# Altium PCB PoEbytastic_v0.1.PcbDoc
Units mm, origin at the board's own origin, x right, y up, seen from the top; angles counter-clockwise.
Board outline 57.53 x 55.13 mm, 2 copper layers (Top Layer, Bottom Layer); 10 components, 36 nets, 125 pads, 59 vias.
Unrouted connection lines stored in the file: 5.
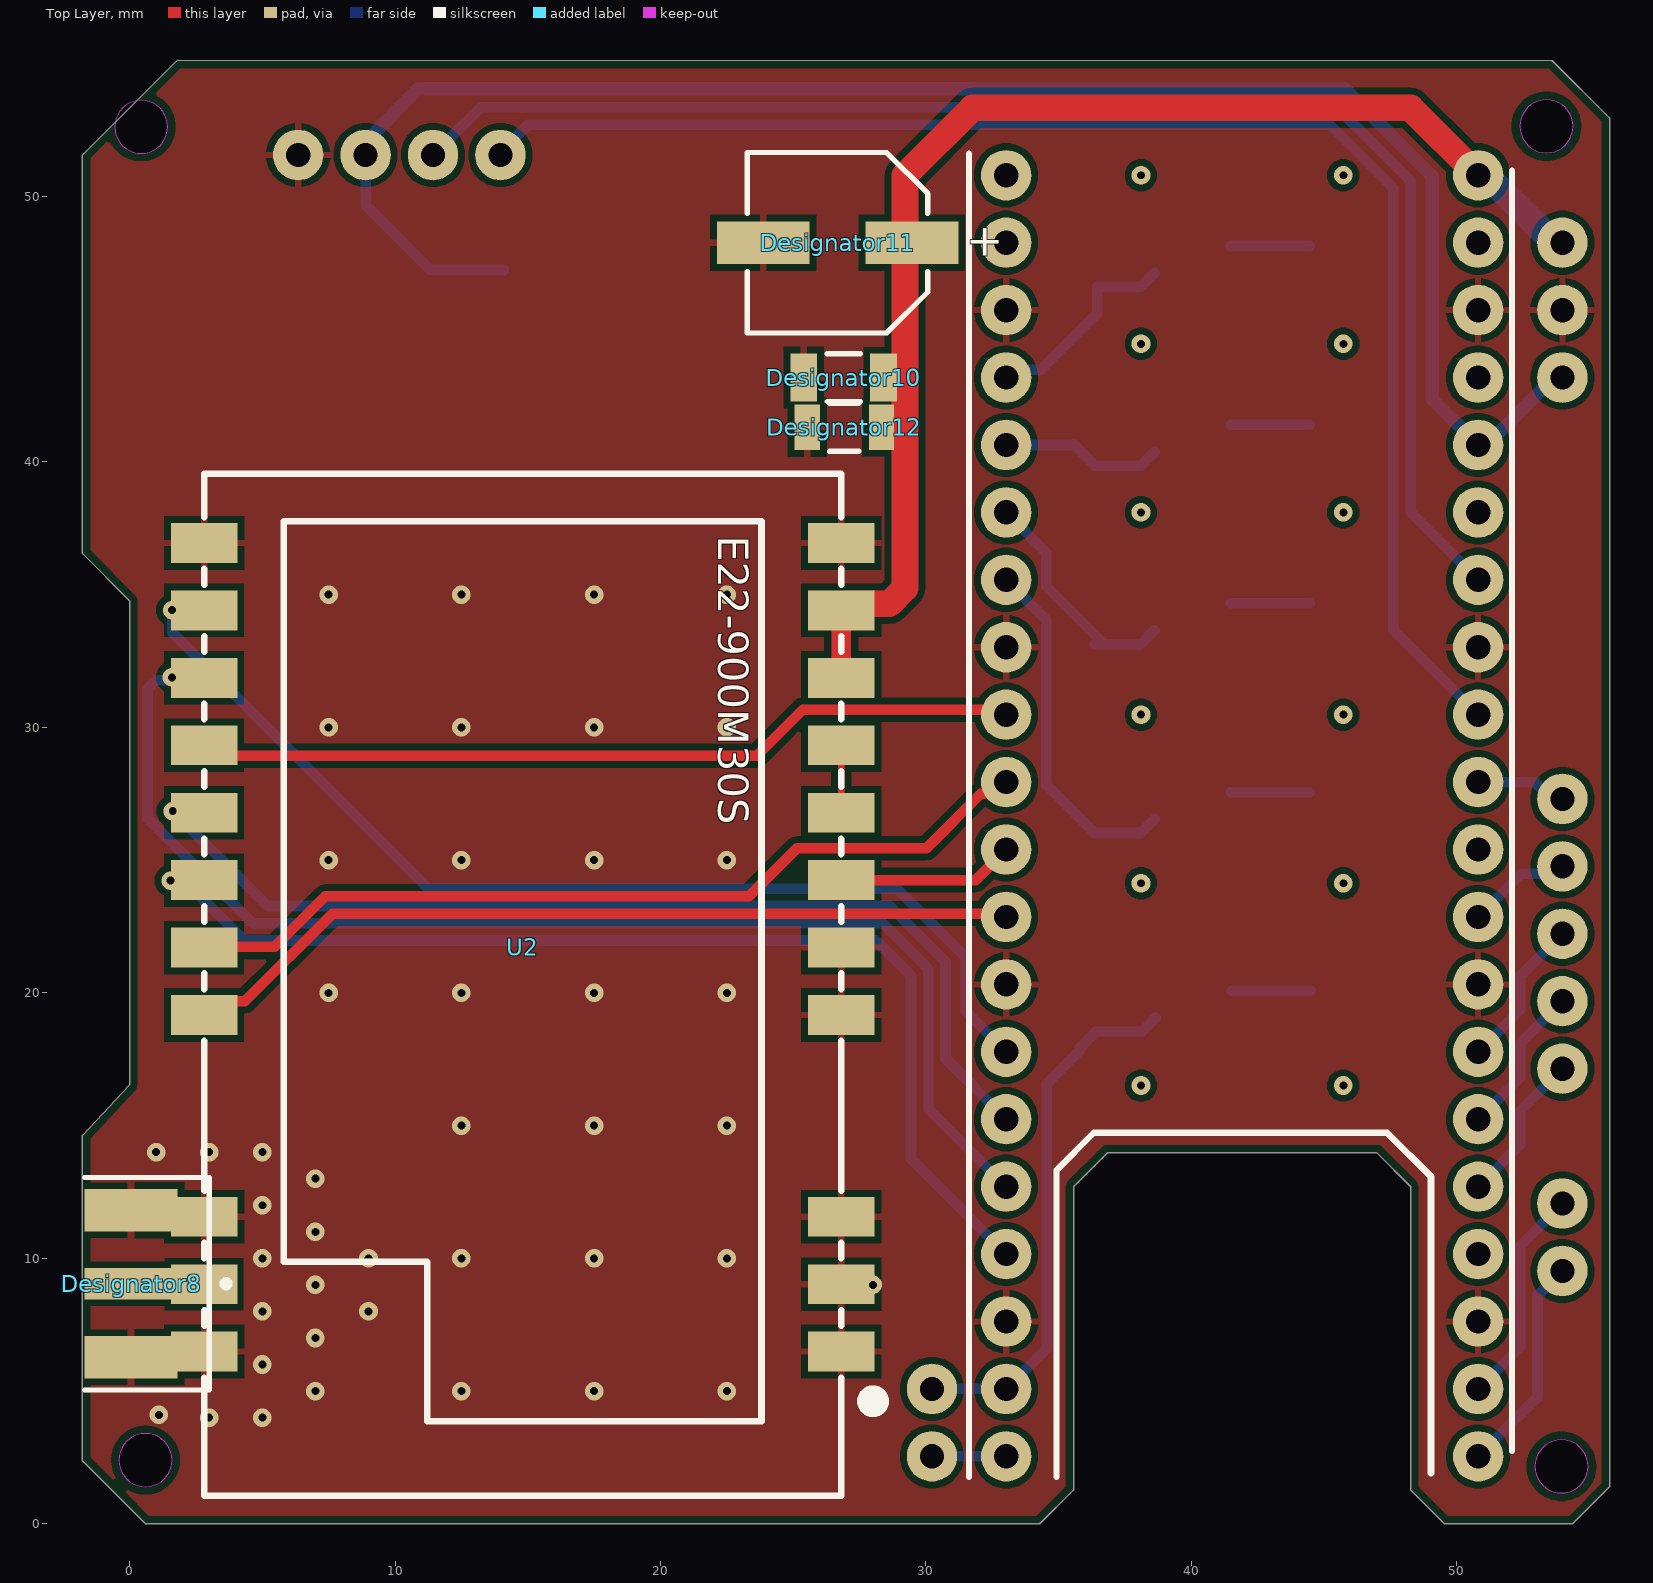
[diagram p0: Top Layer view]
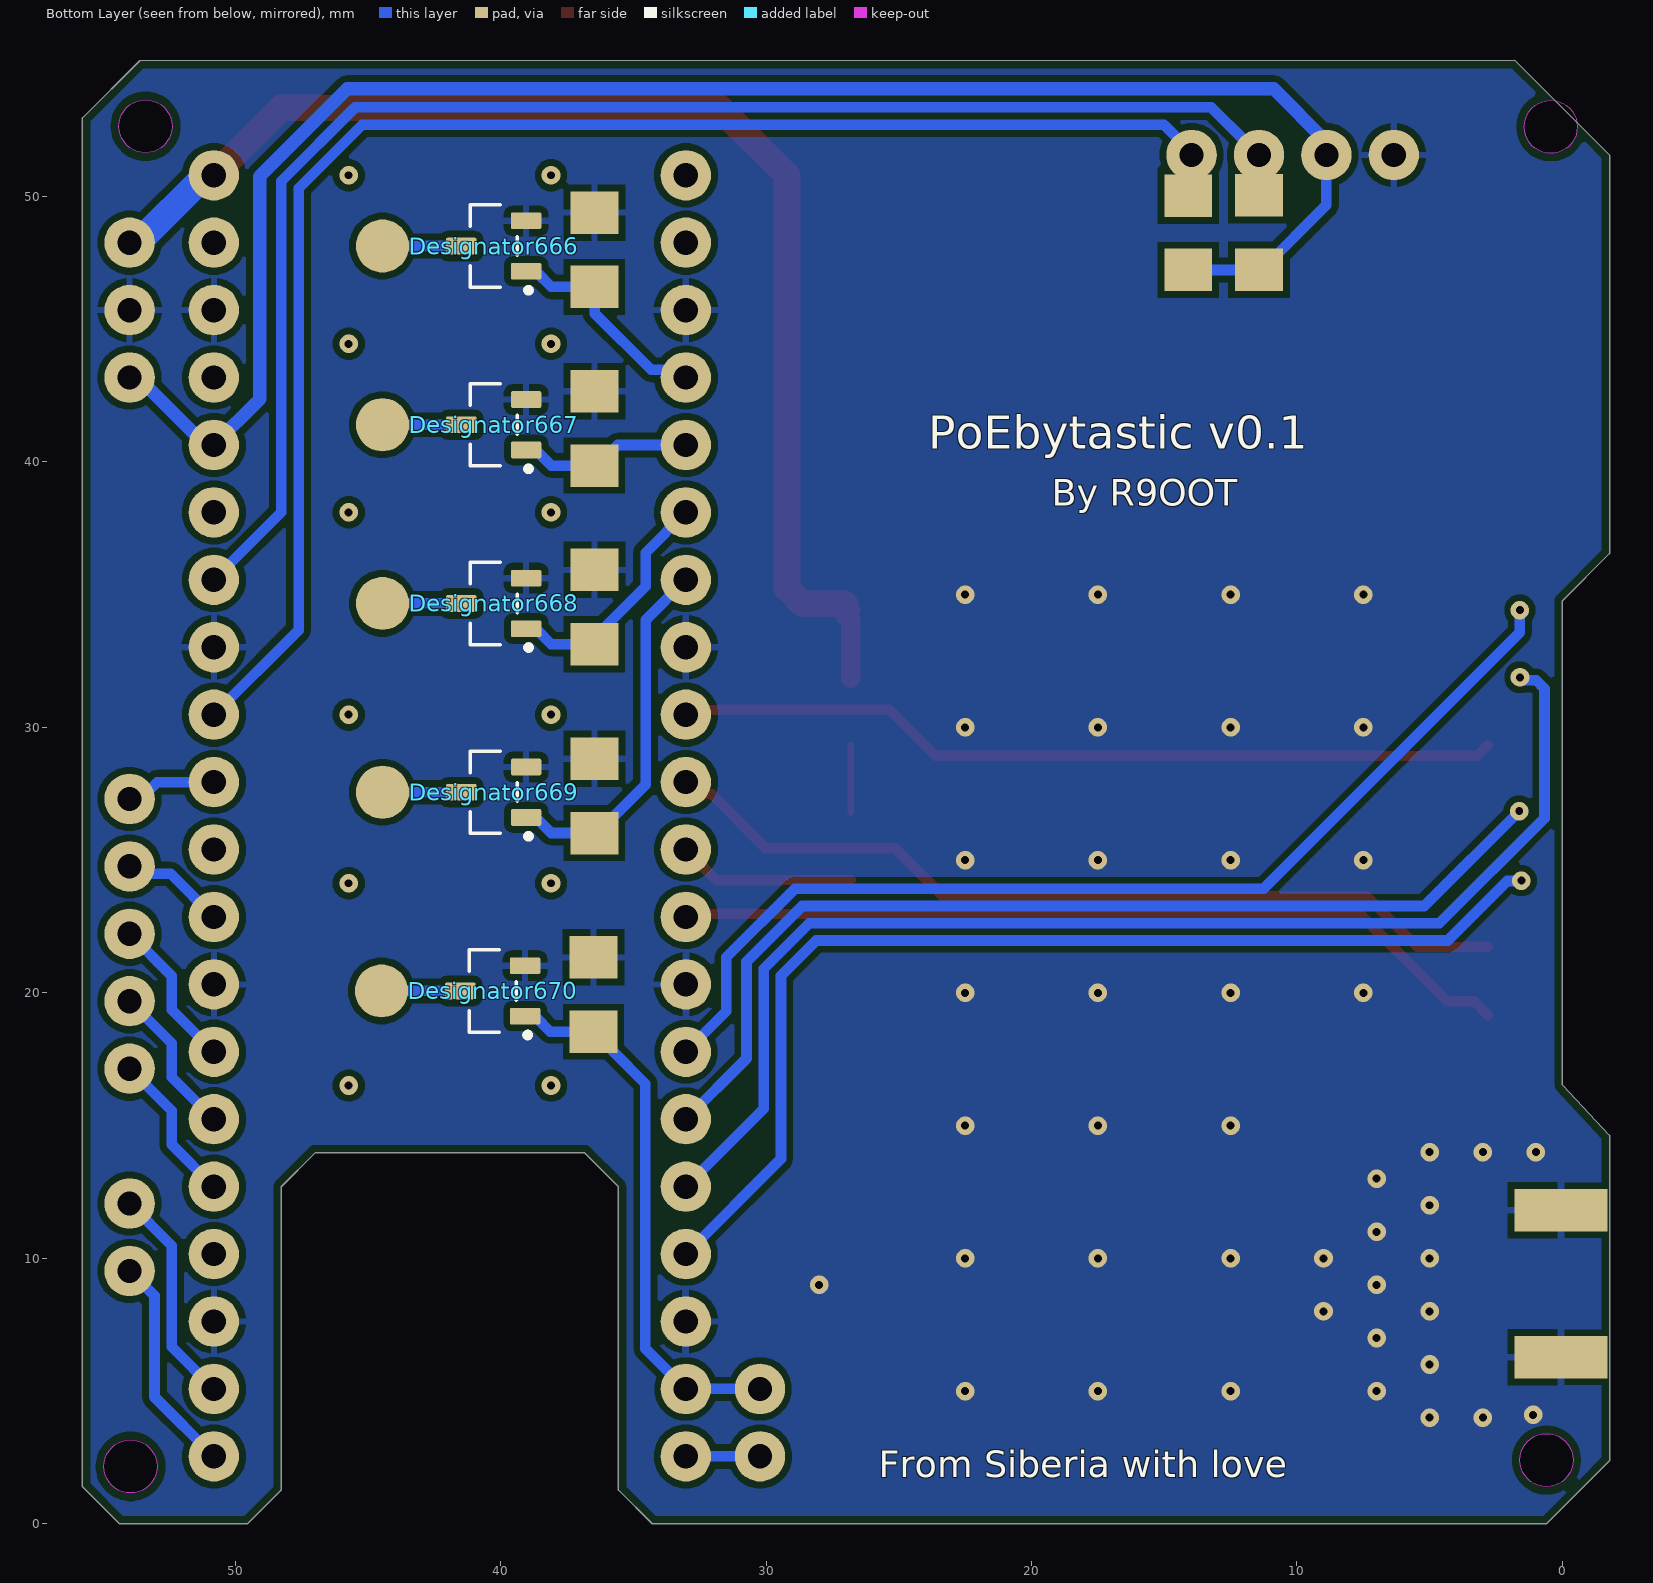
[diagram p1: Bottom Layer view, seen from below]
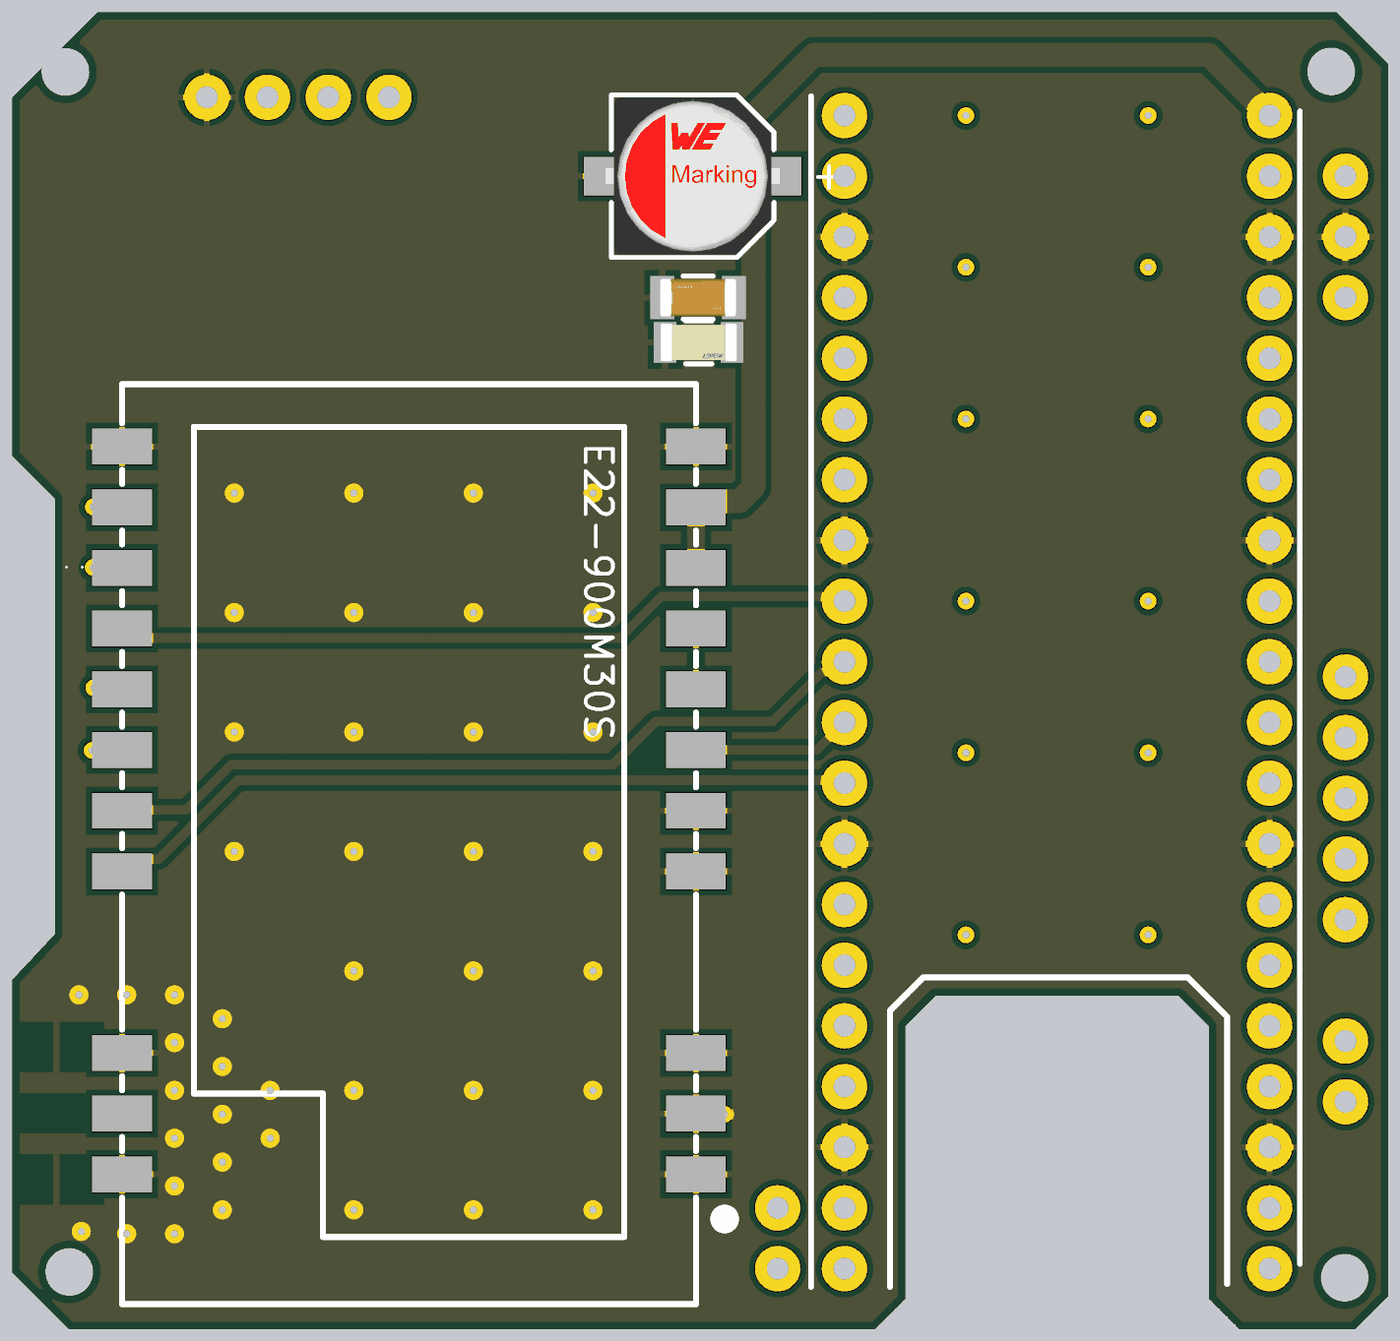
[diagram p2: 3D render of the assembled board from above, using the file's embedded part models]
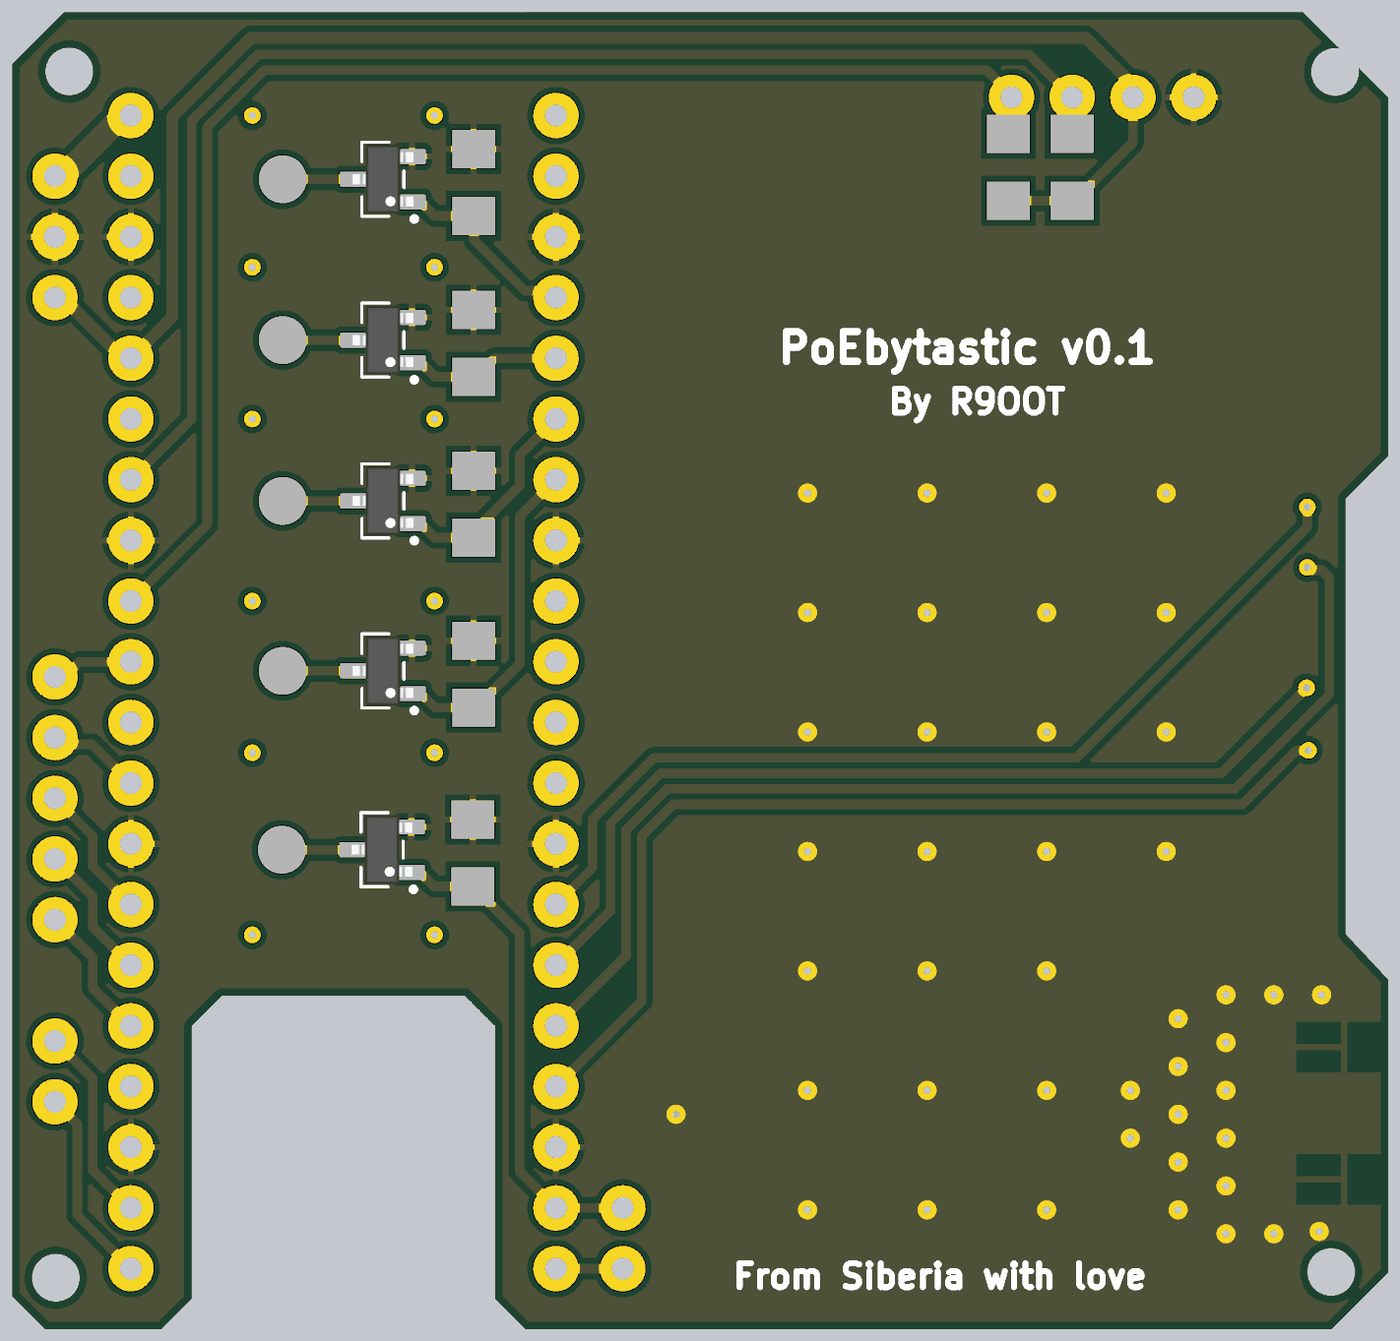
[diagram p3: 3D render of the assembled board from below, using the file's embedded part models]

## Layer stack, top to bottom
Top Solder: solder mask 0.0102, Solder Resist, Dk 3.5
Top Layer: signal copper 0.0356
Dielectric 1: dielectric 0.32, FR-4, Dk 4.8
Bottom Layer: signal copper 0.0356
Bottom Solder: solder mask 0.0102, Solder Resist, Dk 3.5

## Board outline
35.56,1.27 35.56,12.7 36.83,13.97 46.99,13.97 48.26,12.7 48.26,1.27 49.53,0 54.356,0 55.753,1.397 55.753,52.959 53.595,55.117 1.787,55.127 -1.778,51.562 -1.778,36.549 0,34.771 0,16.535 -1.778,14.63 -1.778,2.378 0.6,0 34.29,0
cut-out: 52.375,52.646 ccw(c53.375,52.646) 53.375,51.646 ccw(c53.375,52.646) 54.375,52.646 ccw(c53.375,52.646) 53.375,53.646 ccw(c53.375,52.646)
cut-out: -0.561,52.626 ccw(c0.439,52.626) 0.439,51.626 ccw(c0.439,52.626) 1.439,52.626 ccw(c0.439,52.626) 0.439,53.626 ccw(c0.439,52.626)
cut-out: 52.94,2.161 ccw(c53.94,2.161) 53.94,1.161 ccw(c53.94,2.161) 54.94,2.161 ccw(c53.94,2.161) 53.94,3.161 ccw(c53.94,2.161)
cut-out: -0.4,2.4 ccw(c0.6,2.4) 0.6,1.4 ccw(c0.6,2.4) 1.6,2.4 ccw(c0.6,2.4) 0.6,3.4 ccw(c0.6,2.4)

## Design rules (kind name [scope] priority, off if disabled: settings)
BoardOutlineClearance [All] p1: gap=0.3 ignorepadtopadclearanceinfootprint=FALSE
Clearance [All] p1: gap=0.25 ignorepadtopadclearanceinfootprint=FALSE
PolygonConnect [All] p1: thpad.connectstyle=Relief thpad.reliefconductorwidth=0.254 thpad.reliefentries=4 thpad.polygonreliefangle="90 Angle" thpad.airgapwidth=0.254 smdpad.connectstyle=Relief smdpad.reliefconductorwidth=0.254 smdpad.reliefentries=4 smdpad.polygonreliefangle="90 Angle" smdpad.airgapwidth=0.254 via.connectstyle=Direct via.reliefconductorwidth=0.254 via.reliefentries=4 via.polygonreliefangle="90 Angle" via.airgapwidth=0.254
RoutingVias [All] p1: holewidth=0.711 width=1.27 viastyle="Through Hole" minholewidth=0.711 minwidth=1.27 maxholewidth=0.711 maxwidth=1.27
SilkToSilkClearance [All] p1: silktosilkclearance=0.15
SilkToSolderMaskClearance [IsPad] p1: minsilkscreentomaskgap=0.15 clearancetoexposedcopper=TRUE
SolderMaskExpansion [All] p1: expansion=0.05 istentingtop=FALSE
Width [All] p1: maxlimit=1 minlimit=0.25 preferedwidth=0.4 minimp=50.000000 maximp=50.000000 favimp=50.000000
28 further rules are at their usual default settings.

## Components (designator, comment, footprint, x,y, rotation, side; value= is the part's Value field where it differs from the comment)
Designator8 "Comment" FP-CON-SMA-EDGE-S-MFG -7.2,9.042 r90 top
Designator10 "Comment" FP-CC1206-1_25-MFG 26.9,43.18 r180 top
Designator11 "Comment" WCAP-AS5H_D6.3H7.7 26.67,48.26 r0 top
Designator12 "Comment" FP-C1206C-EB-MFG 26.924,41.306 r180 top
Designator666 "Comment" SOT23-3 40.259,48.133 r90 bottom
Designator667 "Comment" SOT23-3 40.259,41.402 r90 bottom
Designator668 "Comment" SOT23-3 40.259,34.671 r90 bottom
Designator669 "Comment" SOT23-3 40.259,27.559 r90 bottom
Designator670 "Comment" SOT23-3 40.296,20.074 r90 bottom
U2 "E22-900M30S" WIRELM-SMD_E22-900M30S 14.808,21.717 r0 top

## Footprints (in the part's own frame and the unit in brackets; to place one, negate y for a bottom-side part, rotate by r counter-clockwise, add the part's x,y. Pads: shape width x height; smd on the part's side, far side on the other; paste and mask are expansions set on the pad)
FP-C1206C-EB-MFG [mm]
  rect 0.95x1.7 smd paste+0 mask+0: 1(-1.4,0) 2(1.4,0)
  silkscreen extent -0.55,-0.9 0.55,0.9, body extent -2,-1 2,1, height 0.25
FP-CC1206-1_25-MFG [mm]
  rect 1x1.8 smd paste+0 mask+0: 1(-1.5,0) 2(1.5,0)
  silkscreen extent -0.63,-0.9 0.63,0.9, body extent -2.2,-1.25 2.2,1.25, height 0.25
FP-CON-SMA-EDGE-S-MFG [mm]
  rect 1.2x3.5 smd paste+0 mask+0: 1(0,-7.26)
  rect 1.6x3.5 smd paste+0 mask+0: 2(-2.77,-7.26) 3(2.77,-7.26)
  rect 1.6x3.5 smd far side paste+0 mask+0: 4(-2.77,-7.26) 5(2.77,-7.26)
  silkscreen extent -4,-10.96 4,-5.5, body extent -3.67,-9.86 3.67,4.86, height 0.25
SOT23-3 [mm]
  rrect20% 0.63x1.15 smd: 1(-0.95,-1.22) 2(0.95,-1.22) 3(0,1.22)
  silkscreen extent -1.76,-1.41 1.55,0.88, body extent -1.44,-1.27 1.44,1.28, height 1.45
WCAP-AS5H_D6.3H7.7 [mm] "Aluminum Electrolytic Capacitors, 6.3x7.7mm"
  rect 3.5x1.6 smd: 1(2.8,0) 2(-2.8,0)
  silkscreen extent -3.4,-3.4 3.4,3.4, body extent -3.65,-3.3 3.65,3.3, height 7.7
WIRELM-SMD_E22-900M30S [mm]
  rect 2.5x1.5 smd paste+0 mask+0.051: 1(12,-15.23) 2(12,-12.69) 3(12,-10.15) 4(12,-2.55) 5(12,-0.01) 6(12,2.53) 7(12,5.07) 8(12,7.61) 9(12,10.15) 10(12,12.69) 11(12,15.23) 12(-12,15.23) 13(-12,12.69) 14(-12,10.15) 15(-12,7.61) 16(-12,5.07) 17(-12,2.53) 18(-12,-0.01) 19(-12,-2.55) 20(-12,-10.15) 21(-12,-12.69) 22(-12,-15.23)
  silkscreen extent -12,-20.66 13.5,17.84

## Part data
Designator666 Designator667 Designator668 Designator669 Designator670: library part 1-009-727

## Free pads (board coordinates)
  round 1.9 hole 0.915: 0(50.8,10.16) 1(6.35,51.562) 1(8.89,51.562) 1(11.43,51.562) 1(13.97,51.562) 1(50.8,12.7) 1(53.975,17.145) 2(50.8,15.24) 2(53.975,19.685) 3(50.8,17.78) 3(53.975,22.225) 3V3(50.8,40.64) 3V3(53.975,43.18) 3V3_EN(50.8,43.18) 15(50.8,22.86) 15(53.975,24.765) 16(50.8,30.48) 17(50.8,35.56) 18(50.8,27.94) 18(53.975,27.305) "19 USB"(33.02,48.26) "20 USB"(33.02,50.8) "21 RGB"(50.8,38.1) 33(30.226,2.54) 33(33.02,2.54) 34(30.226,5.08) 34(33.02,5.08) 35(33.02,10.16) 36(33.02,12.7) 37(33.02,15.24) 38(33.02,17.78) 39(33.02,22.86) 40(33.02,25.4) 41(33.02,27.94) 42(33.02,30.48) "43 UART"(50.8,2.54) "43 UART"(53.975,9.525) "44 UART"(50.8,5.08) "44 UART"(53.975,12.065) 45(33.02,35.56) 46(33.02,38.1) 47(33.02,40.64) 48(33.02,43.18) GND(33.02,7.62) GND(33.02,20.32) GND(33.02,33.02) GND(33.02,45.72) GND(50.8,7.62) GND(50.8,20.32) GND(50.8,33.02) GND(50.8,45.72) GND(53.975,45.72) RUN(50.8,25.4) VBUS(50.8,50.8) VBUS(53.975,48.26) VSYS(50.8,48.26)
  round 0.102 on Top Overlay: 1(0.488,31.9) 1(1.143,31.9)
  rect 1.8x1.6 smd far side paste+0: 1(11.43,47.238) 1(11.43,50.038) 1(14.097,47.232) 1(14.097,50.032) 1(36.463,26.021) 1(36.463,28.821) 1(36.463,33.133) 1(36.463,35.933) 1(36.463,39.864) 1(36.463,42.664) 1(36.463,46.595) 1(36.463,49.395) 1(36.5,18.536) 1(36.5,21.336)
  round 2 smd far side: 2(44.45,27.559) 2(44.45,34.671) 2(44.45,41.402) 2(44.45,48.133) 2(44.487,20.074)

## Via types
v1: diameter 0.7, hole 0.3, Top Layer to Bottom Layer, 59 vias

## Nets (pads, with @x,y where several pads share a name; then routed paths per layer and width w, separated by ;. In a path a pad name is that pad's centre, name@x,y a point inside that pad or via, vN(x,y) a via of type N, cw(c..) or ccw(c..) an arc to the next point about the centre after c; other vN are vias at no path point)
1: pad.1@50.8,12.7 pad.1@53.975,17.145 | length 5.8
  Bottom Layer w0.4: pad.1@50.8,12.7 52.387,14.287 52.387,15.557 pad.1@53.975,17.145
2: pad.2@50.8,15.24 pad.2@53.975,19.685 | length 5.8
  Bottom Layer w0.4: pad.2@50.8,15.24 52.387,16.827 52.387,18.097 pad.2@53.975,19.685
3: pad.3 | length 5.8
  Bottom Layer w0.4: pad.3@50.8,17.78 52.387,19.368 52.387,20.638 pad.3@53.975,22.225
15: pad.15 | length 4
  Bottom Layer w0.4: pad.15@50.8,22.86 52.425,24.485 53.695,24.485 pad.15@53.975,24.765
18: pad.18 | length 3.4
  Bottom Layer w0.4: pad.18@50.8,27.94 52.934,27.94 53.569,27.305 pad.18@53.975,27.305
106: 
$Net33: pad.33 | length 2.8
  Bottom Layer w0.4: pad.33@30.226,2.54 pad.33@33.02,2.54
$Net34: Designator670.1 pad.1@36.5,18.536 pad.34 | length 20.1
  Bottom Layer w0.4: pad.34@30.226,5.08 33.02,5.08 34.544,6.604 34.544,16.58 35.8,17.836 35.8,17.936 36.4,18.536 36.5,18.536 38.123,18.536 Designator670.1@38.645,19.058
+3.3v: pad.1@8.89,51.562 pad.1@11.43,47.238 pad.1@14.097,47.232 pad.3V3 | length 65.5
  Bottom Layer w0.4: pad.1@8.89,51.562 8.89,49.678 11.33,47.238 11.43,47.238 11.436,47.232 pad.1@14.097,47.232 ; pad.3V3@50.8,40.64 pad.3V3@51.117,40.64 ; pad.3V3@53.657,43.18 pad.3V3@53.975,43.18
  Bottom Layer w0.5: pad.1@8.89,52.07 10.875,54.055 45.771,54.055 49.072,50.754 49.072,42.368 pad.3V3@50.8,40.64 ; pad.3V3@51.117,40.64 pad.3V3@53.657,43.18
+5v: Designator10.1 Designator11.1 Designator12.1 pad.VBUS U2.9 U2.10 | length 48.9
  Top Layer w0.75: U2.9 26.808,34.008 27.008,34.208 U2.10 U2.10@27.001,34.6
  Top Layer w1: U2.10@27.001,34.6 27.058,34.657 28.624,34.657 29.21,35.243 29.21,50.8 31.75,53.34 48.26,53.34 pad.VBUS@50.8,50.8
  Bottom Layer w0.4: pad.VBUS@50.8,50.8 pad.VBUS@51.117,50.8 ; pad.VBUS@53.657,48.26 pad.VBUS@53.975,48.26
  Bottom Layer w1: pad.VBUS@51.117,50.8 pad.VBUS@53.657,48.26
+B: 
AUX_0: Designator666.1 pad.1@36.463,46.595 pad.48 | length 7.8
  Bottom Layer w0.4: pad.48 33.307,43.467 34.323,43.467 36.449,45.593 36.449,46.581 36.463,46.595 38.086,46.595 Designator666.1@38.608,47.117
AUX_1: Designator667.1 pad.1@36.463,39.864 pad.47 | length 6.1
  Bottom Layer w0.4: pad.47 35.587,40.64 36.363,39.864 36.463,39.864 38.086,39.864 Designator667.1@38.608,40.386
AUX_2: Designator668.1 pad.1@36.463,33.133 pad.46 | length 8.8
  Bottom Layer w0.4: pad.46 34.535,36.585 34.535,35.315 pad.1@36.59,33.26 ; pad.1@36.363,33.133 36.463,33.133 38.086,33.133 Designator668.1@38.608,33.655
AUX_3: Designator669.1 pad.1@36.463,26.021 pad.45 | length 13.4
  Bottom Layer w0.4: pad.45 34.535,34.045 34.535,27.849 36.363,26.021 36.463,26.021 38.086,26.021 Designator669.1@38.608,26.543
AUX_4: 
"Batt% 031": 
BUSY: pad.36 U2.14 | length 47.1
  Bottom Layer w0.4: v1@1.623,31.773 0.988,31.773 0.676,31.46 0.676,26.58 4.633,22.622 ; 4.633,22.621 28.373,22.621 30.084,20.91 30.084,15.636 pad.36
  other v1: 1.599,31.887
"Button 100": 
CS: pad.39 U2.19 | length 31.8
  Top Layer w0.4: U2.19 3.324,19.683 4.341,19.683 7.645,22.987 pad.39@33.02,22.987
DIO1: pad.38 U2.13 | length 40
  Bottom Layer w0.4: v1(1.6,34.417) 1.6,33.579 11.258,23.921 28.911,23.921 31.496,21.336 31.496,19.304 pad.38
DIO2: U2.7 U2.8 | length 2.5
  Top Layer w0.254: U2.7 U2.8
GND: Designator8.2 Designator8.3 Designator8.4 Designator8.5 Designator10.2 Designator11.2 Designator12.2 Designator666.2 Designator667.2 Designator668.2 Designator669.2 Designator670.2 pad.1@6.35,51.562 pad.1@36.5,21.336 pad.1@36.463,28.821 pad.1@36.463,35.933 pad.1@36.463,42.664 pad.1@36.463,49.395 pad.GND U2.1 U2.2 U2.3 U2.4 U2.5 U2.11 U2.12 U2.20 U2.22
  other v1: 3,4 5,4 1.1,4.1 7,5 12.5,5 17.5,5 22.5,5 5,6 7,7 5,8 9,8 7,9 28,9 5,10 9,10 12.5,10 17.5,10 22.5,10 7,11 5,12 7,13 1,14 3,14 5,14 12.5,15 17.5,15 22.5,15 7.5,20 12.5,20 17.5,20 22.5,20 7.5,25 12.5,25 17.5,25 22.5,25 7.5,30 12.5,30 17.5,30 22.5,30 7.5,35 12.5,35 17.5,35 22.5,35
"GPS_RX 020": 
"GPS_TX 022": 
MISO: pad.37 U2.16 | length 38.3
  Bottom Layer w0.4: v1(1.626,26.848) 5.202,23.271 28.642,23.271 30.734,21.179 30.734,17.526 pad.37
MOSI: pad.35 U2.17 | length 41.3
  Bottom Layer w0.4: v1(1.549,24.232) 1.567,24.214 2.075,24.214 4.318,21.971 28.103,21.971 29.434,20.64 29.434,13.746 pad.35
NRST: pad.42 U2.15 | length 31.1
  Top Layer w0.4: U2.15 3.205,28.931 23.622,28.931 25.358,30.667 pad.42@33.02,30.667
RST: 
RXEN: pad.40 U2.6 | length 6.7
  Top Layer w0.4: U2.6 31.867,24.247 pad.40
SCK: pad.41 U2.18 | length 32.8
  Top Layer w0.4: U2.18@2.808,21.732 5.471,21.732 7.376,23.637 23.332,23.637 25.142,25.447 30.019,25.447 32.07,27.498 32.172,27.498 32.614,27.94 pad.41
SCL: pad.1@11.43,50.038 pad.1@11.43,51.562 pad.17 | length 54.6
  Bottom Layer w0.4: pad.1@11.448,52.052 11.92,52.052 13.223,53.355 45.481,53.355 48.26,50.576 48.26,38.1 pad.17
SDA: pad.1@13.97,51.562 pad.1@14.097,50.032 pad.16 | length 56
  Bottom Layer w0.4: pad.1@13.97,52.07 14.376,52.07 15.011,52.705 45.212,52.705 47.609,50.308 47.609,33.671 pad.16
"uart 43": "pad.43 UART" | length 8.3
  Bottom Layer w0.4: 50.8,2.54 53.037,4.777 53.037,8.587 53.975,9.525
"uart 44": "pad.44 UART" | length 8.3
  Bottom Layer w0.4: 50.8,5.08 52.387,6.668 52.387,10.478 53.975,12.065
"V In": 
pads on no net: Designator8.1 Designator666.3 Designator667.3 Designator668.3 Designator669.3 Designator670.3 U2.21
copper on no net: | length 14.9
  Bottom Layer w0.4: 41.479,27.559 44.45,27.559 ; 41.479,34.671 44.45,34.671 ; 41.479,41.402 44.45,41.402 ; 41.479,48.133 44.45,48.133 ; 41.516,20.074 44.487,20.074
  other v1: 38.1,16.51 45.72,16.51 38.1,24.13 45.72,24.13 38.1,30.48 45.72,30.48 38.1,38.1 45.72,38.1 38.1,44.45 45.72,44.45 38.1,50.8 45.72,50.8

## Polygon pours and split planes (outlines as drawn)
GND on Bottom Layer "+24_IO" (solid, remove dead copper, pour order 0): -2.54,-0.995 57.15,-0.995 57.15,55.88 -2.54,55.88
GND on Top Layer "+24_IO" (solid, remove dead copper, pour order 1): -2.54,-0.995 57.15,-0.995 57.15,55.88 -2.54,55.88

## Silkscreen, mask and mechanical layers (free items; w line width, h text height)
Top Overlay:
  lines w0.229: 31.623,1.768 31.623,51.613 ; 34.925,1.768 34.925,13.335 ; 52.07,2.738 52.07,50.978
  lines w0.254: 34.925,13.335 36.322,14.732 47.371,14.732 49.022,13.081 49.022,1.905
Bottom Overlay:
  text "PoEbytastic v0.1" at 23.881,40.493 h1.25
  text "By R9OOT" at 19.246,38.357 h1
  text "From Siberia with love" at 25.746,1.754 h1
Mechanical 1:
  circle w0.1: c2.399,2.353 r1

## Text inside footprints (layer, text, board x,y; h text height)
Designator11: Top Overlay "+" at 31.52,47.76 h1.22